# Altium PCB FULL_2_PCB.PcbDoc
Units mm, origin at the board's own origin, x right, y up, seen from the top; angles counter-clockwise.
Board outline 92.2 x 63.3 mm, 3 copper layers (Top Layer, Internal Plane 13, Bottom Layer); 44 components, 9 nets, 244 pads, 16 vias.
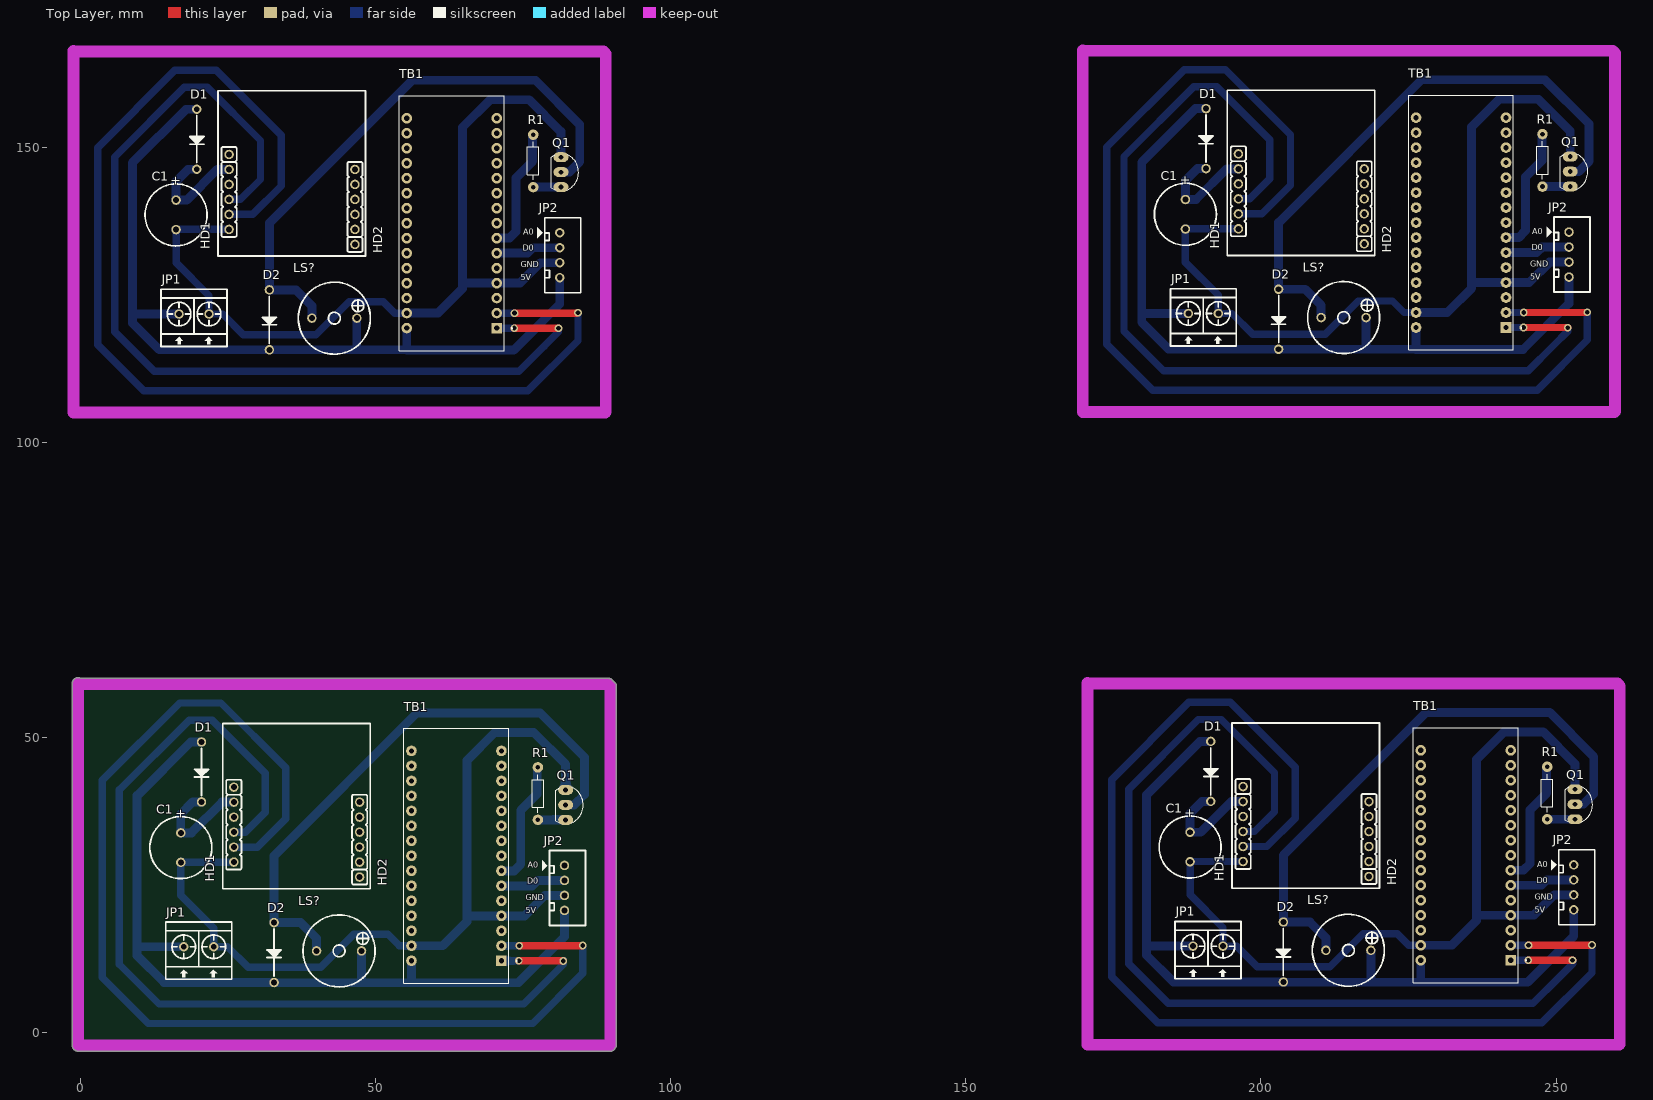
[diagram p0: Top Layer view]
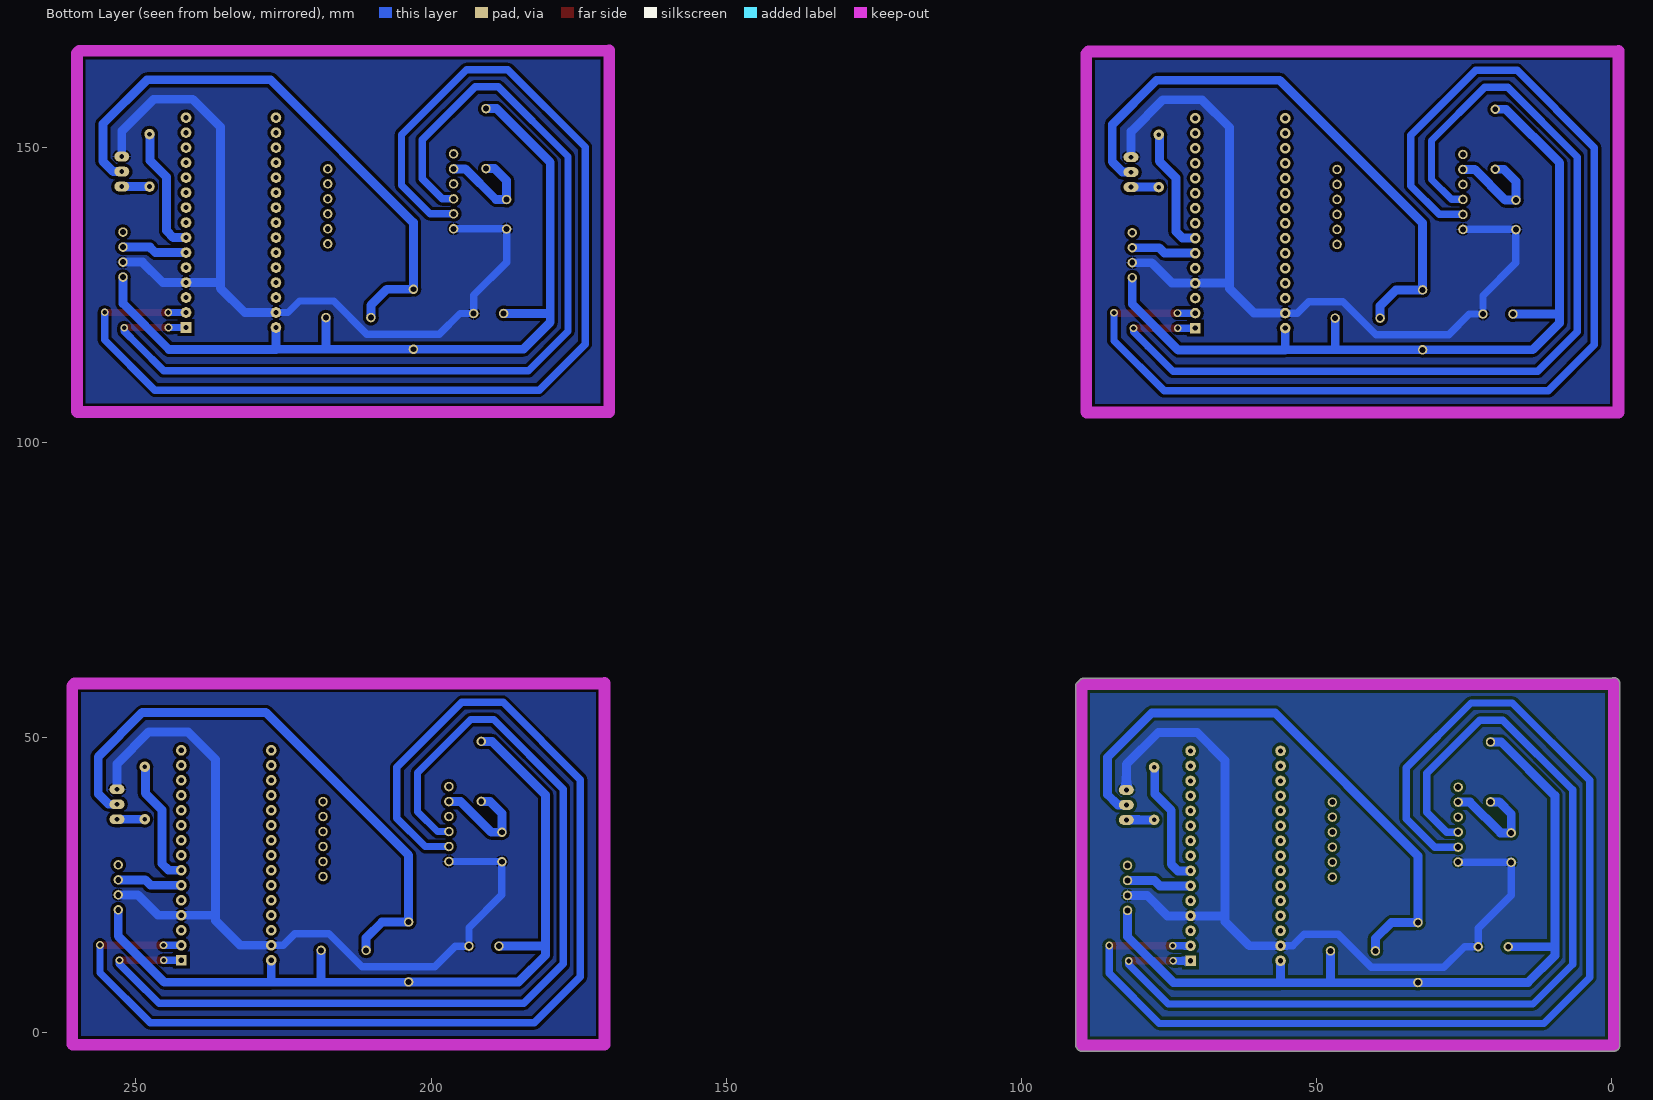
[diagram p1: Bottom Layer view, seen from below]
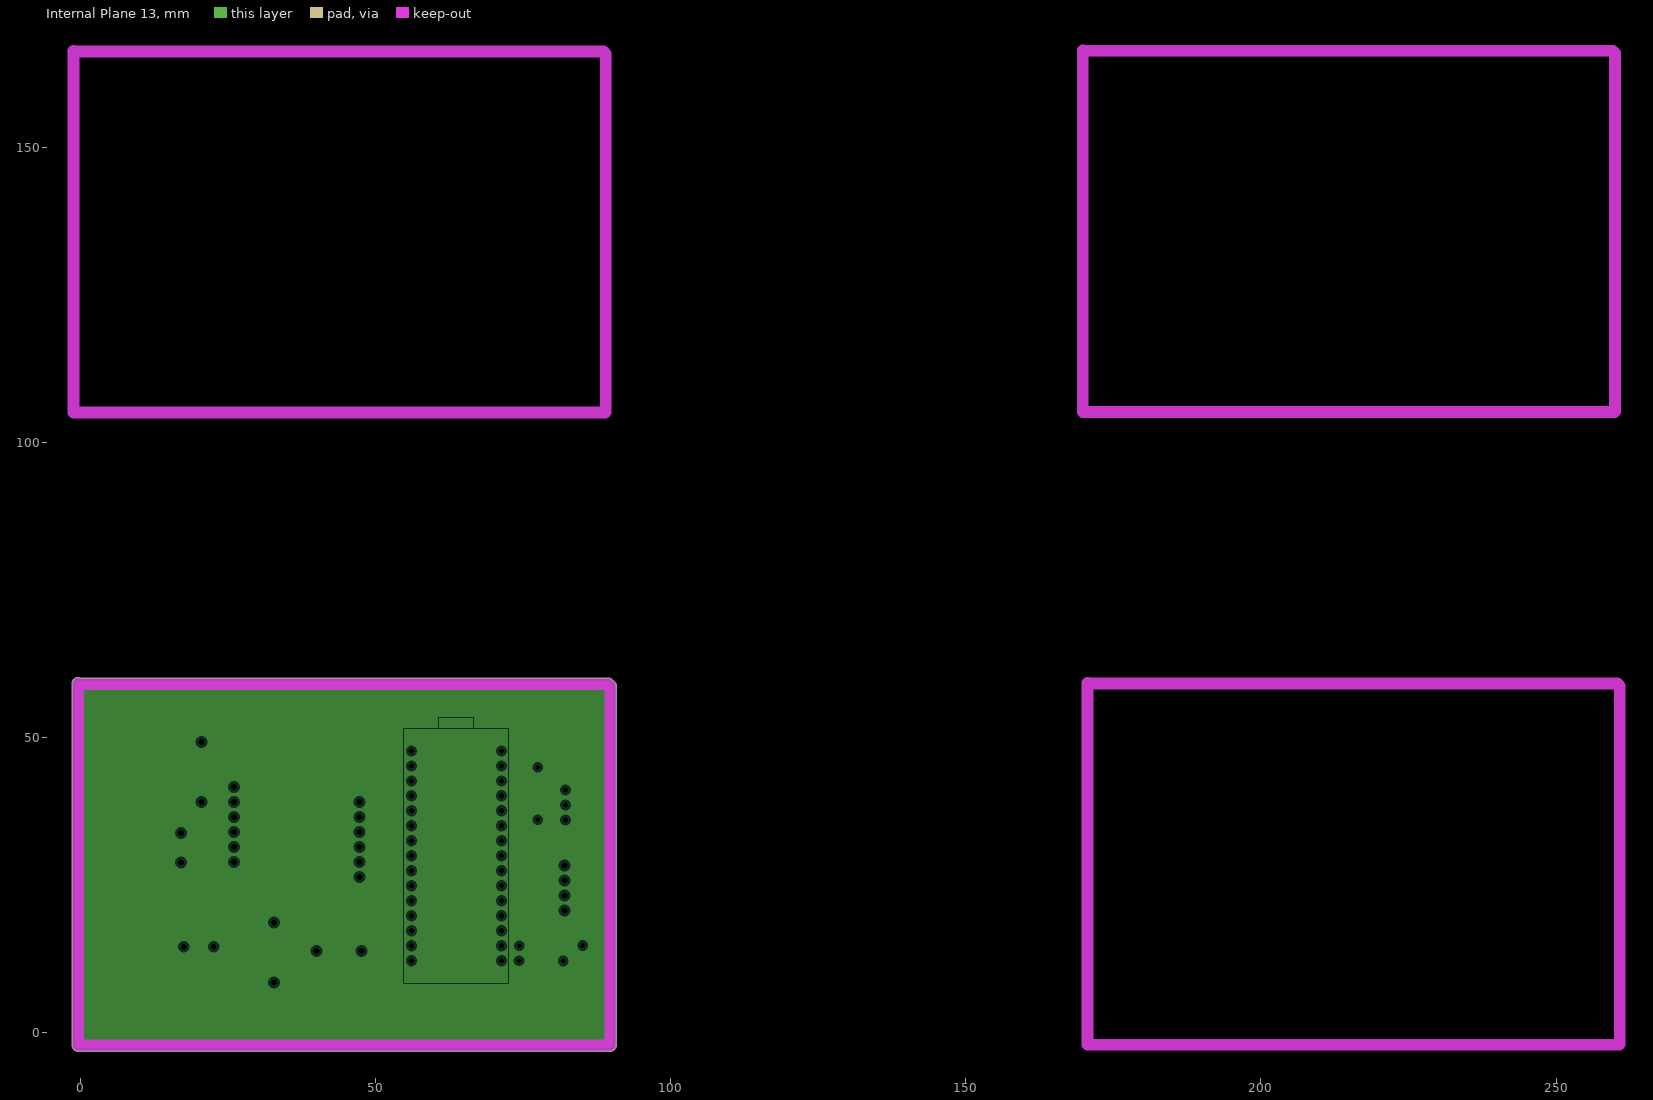
[diagram p2: Internal Plane 13, clearances drawn from the general rule]

## Layer stack, top to bottom
Top Solder: solder mask 0.0102, Solder Resist, Dk 3.5
Top Layer: signal copper 0.0356
Dielectric 1: dielectric 0.32, FR-4, Dk 4.8
Internal Plane 13: plane copper 0.0356
Dielectric2: dielectric 0.32, FR-4, Dk 4.8
Bottom Layer: signal copper 0.0356
Bottom Solder: solder mask 0.0102, Solder Resist, Dk 3.5

## Board outline
-1.4,-2.1 ccw(c-0.4,-2.1) -0.2,-3.08 ccw(c0,-2.1) 0,-3.1 89.7,-3.1 ccw(c89.7,-2.1) 90.456,-2.756 ccw(c89.8,-2) 90.8,-2 90.8,58.7 ccw(c89.8,58.7) 90.279,59.579 ccw(c89.4,59.1) 89.4,60.1 0.036,60.1 ccw(c-0.4,59.2) -1.4,59.2

## Design rules (kind name [scope] priority, off if disabled: settings)
Clearance [All] p1: gap=0.5 ignorepadtopadclearanceinfootprint=FALSE
PlaneClearance [All] p1: clearance=0.508
PlaneConnect [All] p1: planeconnectstyle=Relief reliefexpansion=0.508 reliefentries=4 reliefconductorwidth=0.254 reliefairgap=0.254
PolygonConnect [All] p1: connectstyle=Relief reliefconductorwidth=0.254 reliefentries=4 polygonreliefangle="90 Angle" airgapwidth=0.254
RoomDefinition FULL_2_SCH [InComponentClass('FULL_2_SCH')] p1: confinementstyle=ConfineIn formatcopy=TRUE lockcomponents=FALSE outline -55.5,-57.6 -4.7,-57.6 -4.7,-32.2 -55.5,-32.2
RoutingVias [All] p1: holewidth=0.711 width=1.27 viastyle="Through Hole" minholewidth=0.711 minwidth=1.27 maxholewidth=0.711 maxwidth=1.27
SolderMaskExpansion [All] p1: expansion=0.102
Width [All] p1: maxlimit=2 minlimit=1 preferedwidth=1.25
28 further rules are at their usual default settings.

## Classes and differential pairs
component class FULL_2_SCH: C1 D1 D2 HD1 HD2 JP2 LS? Q1 R1 TB1

## Components (designator, comment, footprint, x,y, rotation, side; value= is the part's Value field where it differs from the comment)
C1 "1000uF" CAP_1000UF_16V 188,34 r270 top value=1000uF/16V
C1 "1000uF" CAP_1000UF_16V 187.2,141.2 r270 top value=1000uF/16V
C1 "1000uF" CAP_1000UF_16V 16.2,141.1 r270 top value=1000uF/16V
C1 "1000uF" CAP_1000UF_16V 17,33.9 r270 top value=1000uF/16V
D1 "1N4007" 1N4007 191.5,49.4 r270 top
D1 "1N4007" 1N4007 190.7,156.6 r270 top
D1 "1N4007" 1N4007 19.7,156.5 r270 top
D1 "1N4007" 1N4007 20.5,49.3 r270 top
D2 "1N4007" 1N4007 203.8,18.8 r270 top
D2 "1N4007" 1N4007 203,126 r270 top
D2 "1N4007" 1N4007 32,125.9 r270 top
D2 "1N4007" 1N4007 32.8,18.7 r270 top
HD1 "HD6" Header_6 196.98,35.39 r270 top
HD1 "HD6" Header_6 196.18,142.59 r270 top
HD1 "HD6" Header_6 25.18,142.49 r270 top
HD1 "HD6" Header_6 25.98,35.29 r270 top
HD2 "HD6" Header_6 218.3,32.85 r90 top
HD2 "HD6" Header_6 217.5,140.05 r90 top
HD2 "HD6" Header_6 46.5,139.95 r90 top
HD2 "HD6" Header_6 47.3,32.75 r90 top
JP1 "ED2609-ND" DOMINO_OSTTC_2P 191.04,14.7 r180 top value="Connector 2"
JP1 "ED2609-ND" DOMINO_OSTTC_2P 190.24,121.9 r180 top value="Connector 2"
JP1 "ED2609-ND" DOMINO_OSTTC_2P 19.24,121.8 r180 top value="Connector 2"
JP1 "ED2609-ND" DOMINO_OSTTC_2P 20.04,14.6 r180 top value="Connector 2"
JP2 "JP4" CON4 253,24.67 r270 top value="Connector 4"
JP2 "JP4" CON4 252.2,131.87 r270 top value="Connector 4"
JP2 "JP4" CON4 81.2,131.77 r270 top value="Connector 4"
JP2 "JP4" CON4 82,24.57 r270 top value="Connector 4"
LS? "TMB12A05" SPEAKER 218.62,14 r180 top
LS? "TMB12A05" SPEAKER 217.82,121.2 r180 top
LS? "TMB12A05" SPEAKER 46.82,121.1 r180 top
LS? "TMB12A05" SPEAKER 47.62,13.9 r180 top
Q1 "C1815" QTO-92 253.2,38.74 r270 top
Q1 "C1815" QTO-92 252.4,145.94 r270 top
Q1 "C1815" QTO-92 81.4,145.84 r270 top
Q1 "C1815" QTO-92 82.2,38.64 r270 top
R1 "2k2" R1/4W 248.5,36.2 r90 top value="R1/4W - 1K"
R1 "2k2" R1/4W 247.7,143.4 r90 top value="R1/4W - 1K"
R1 "2k2" R1/4W 76.7,143.3 r90 top value="R1/4W - 1K"
R1 "2k2" R1/4W 77.5,36.1 r90 top value="R1/4W - 1K"
TB1 "ARDUINO_NANO" *SHIELD_ARDUINO_NANO 234.7,30.1 r180 top
TB1 "ARDUINO_NANO" *SHIELD_ARDUINO_NANO 233.9,137.3 r180 top
TB1 "ARDUINO_NANO" *SHIELD_ARDUINO_NANO 62.9,137.2 r180 top
TB1 "ARDUINO_NANO" *SHIELD_ARDUINO_NANO 63.7,30 r180 top

## Footprints (in the part's own frame and the unit in brackets; to place one, negate y for a bottom-side part, rotate by r counter-clockwise, add the part's x,y. Pads: shape width x height; smd on the part's side, far side on the other; paste and mask are expansions set on the pad)
1N4007 [mm] "DIODE_DIP"
  round 1.6 hole 1 mask+0.1: 1(0,0) 2(10.16,0)
  silkscreen extent 1.08,-1.2 9.08,1.21, body extent -0.72,-1.25 10.88,1.25, height 2.75
*SHIELD_ARDUINO_NANO [mm]
  rect 1.8x1.8 hole 0.9: 1(-7.62,17.78)
  round 1.8 hole 0.9: 2(-7.62,15.24) 3(-7.62,12.7) 4(-7.62,10.16) 5(-7.62,7.62) 6(-7.62,5.08) 7(-7.62,2.54) 8(-7.62,0) 9(-7.62,-2.54) 10(-7.62,-5.08) 11(-7.62,-7.62) 12(-7.62,-10.16) 13(-7.62,-12.7) 14(-7.62,-15.24) 15(-7.62,-17.78) 16(7.62,-17.78) 17(7.62,-15.24) 18(7.62,-12.7) 19(7.62,-10.16) 20(7.62,-7.62) 21(7.62,-5.08) 22(7.62,-2.54) 23(7.62,0) 24(7.62,2.54) 25(7.62,5.08) 26(7.62,7.62) 27(7.62,10.16) 28(7.62,12.7) 29(7.62,15.24) 30(7.62,17.78)
  Internal Plane 13 circle w0.2: c-10.2,17.8 r0.1
  Internal Plane 13 circle w0.2: c-10.2,17.8 r0.1
  Internal Plane 13 lines w0.127: 8.89,21.59 8.89,-21.59 ; 8.89,21.59 -8.89,21.59 ; 8.89,21.59 8.89,-21.59 ; 8.89,21.59 -8.89,21.59 ; 8.89,-21.59 3,-21.59 ; 8.89,-21.59 3,-21.59 ; 3,-21.59 3,-23.495 ; 3,-21.59 -2.97,-21.59 ; 3,-21.59 3,-23.495 ; 3,-21.59 -2.97,-21.59 ; 3,-23.495 -2.97,-23.495 ; 3,-23.495 -2.97,-23.495 ; -2.97,-21.59 -2.97,-23.495 ; -2.97,-21.59 -8.89,-21.59 ; -2.97,-21.59 -2.97,-23.495 ; -2.97,-21.59 -8.89,-21.59 ; -8.89,21.59 -8.89,-21.59 ; -8.89,21.59 -8.89,-21.59
  silkscreen extent -10.3,-21.59 8.89,21.59
CAP_1000UF_16V [mm] "Capacitor, Electrolytic, Radial; Body 10 x 16 mm (Dia.xH typ); Pin Spacing 5 mm (typ)"
  round 1.6 hole 1: 1(0,0) 2(5,0)
  silkscreen extent -2.75,-5.25 7.75,5.25, body extent -2.53,-5.03 7.53,5.03, height 16.53
CON4 [mm] "CON4"
  round 1.6 hole 1 mask+0.1: 1(-3.81,0) 2(-1.27,0) 3(1.27,0) 4(3.81,0)
  silkscreen extent -6.35,-3.8 6.35,3.56, body extent -6.25,-2.29 6.25,3.41, height 7
DOMINO_OSTTC_2P [mm] "15A PIN TO PIN 5.08MM ED2609-ND"
  round 1.6 hole 1 mask+0.1: 1(-2.54,0) 2(2.54,0)
  silkscreen extent -5.58,-4.2 5.58,5.5, body extent -5.42,-3.75 5.34,5.25, height 12.5
Header_6 [mm] "Connector DIP Male, 6Pin_2.54mm"
  round 1.6 hole 1 mask+0.1: 1(-6.35,0) 2(-3.81,0) 3(-1.27,0) 4(1.27,0) 5(3.81,0) 6(6.35,0)
  silkscreen extent -7.62,-1.28 7.62,1.28, body extent -7.62,-1.27 7.62,1.27, height 10.1
QTO-92 [mil] "TO-92"
  oval 66x100 hole 32: 1(-100,0) 2(0,0) 3(100,0)
  silkscreen extent -117,-65 120,118, body extent -109,-66 109,95, height 245
R1/4W [mil] "R 1/4W, 2 Pin, 350mil"
  round 70 hole 31: 1(0,0) 2(350,0)
  silkscreen extent 48,-38 302,38, body extent -40,-47 386,47, height 111
SPEAKER [mm] "TMB12A05"
  round 1.6 hole 1 mask+0.1: 1(0,0) 2(7.62,0)
  silkscreen extent -2.29,-6.1 9.91,6.1, body extent -3,-7 11,7, height 7.35

## Part data
C1 C1 C1 C1: library part CP4, "Cap 1000uF/16V - 220uF/50V", Description 1="2200uF-3300uF/6,3V - 1000uF-2200uF/10V", Description 2="1000uF/16V - 470uF => 1000uF/25V - 100uF/100V", Description 3=330uF>470uF/35V_220uF>470uF/50V_10uF>22uF/250V, Description 4="220uF => 330uF/63V - 10uF =>33uF/160 - 200V", Description 5="4,7uF>10uF/250V_3,3uF>10uF/400V - 2,2uF>4,7uF/450V"
D1 D1 D1 D1 D2 D2 D2 D2: "Diode LS 1A 1000V DO-41", ComponentLink1Description=Datasheet, ComponentLink1URL="D:\Dropbox\Datasheets\Diodes and Rectifiers\Diodes\1N400X.pdf", Unit Price=0.0072
HD1 HD1 HD1 HD1 HD2 HD2 HD2 HD2: library part Header6, "Header 6", Creat by=VanDungEvn@Gmail.com
JP1 JP1 JP1 JP1: library part Con2_1, "Connector 2"
JP2 JP2 JP2 JP2: library part Con4, "Connector 4"
LS? LS? LS? LS?: library part Buzz, "Buzzer >= 80dB, 5V"
Q1 Q1 Q1 Q1: "NPN 600mW, ECB", =C2383
R1 R1 R1 R1: library part R1/4W, "Resistor 1/4W"
TB1 TB1 TB1 TB1: "ATmega4809 Arduino Nano Every with Headers AVR® AVR MCU 8-Bit Embedded Evaluation Board", Package=None, Availability=Unavailable, MF=Arduino, MP="ARDUINO NANO", Price=None, SnapEDA_Link=https://www.snapeda.com/parts/ARDUINO%20NANO/Arduino/view-part/1128261/?ref=snap

## Via types
v1: diameter 1.3, hole 0.8, Top Layer to Bottom Layer, 16 vias

## Nets (pads, with @x,y where several pads share a name; then routed paths per layer and width w, separated by ;. In a path a pad name is that pad's centre, name@x,y a point inside that pad or via, vN(x,y) a via of type N, cw(c..) or ccw(c..) an arc to the next point about the centre after c; other vN are vias at no path point)
5V: D1.1@20.5,49.3 D2.2@32.8,8.54 JP1.2@17.5,14.6 JP2.4@82,20.76 LS?.1@47.62,13.9 TB1.30@56.08,12.22 | length 140.1
  Bottom Layer w1.5: JP1.2@17.5,14.6 9.7,14.6 9.6,14.5 ; D1.1@20.5,49.3 18.7,49.3 9.6,40.2 9.6,14.5 ; 47.62,9.22 LS?.1@47.62,13.9 ; TB1.30@56.08,12.22 56.08,8.5 ; JP2.4@82,20.76 82,16.3 74.2,8.5 56.08,8.5 ; 9.6,14.5 9.6,13.1 14.16,8.54 32.8,8.54 56.08,8.5
D0: JP2.2@82,25.84 TB1.6@71.32,24.92 | length 11.1
  Bottom Layer w1.5: TB1.6@71.32,24.92 76.52,24.92 77.44,25.84 JP2.2@82,25.84
GND: C1.2@17,28.9 HD1.6@25.98,28.94 JP1.1@22.58,14.6 JP2.3@82,23.3 Q1.1@82.2,41.18 TB1.4@71.32,19.84 TB1.29@56.08,14.76 | length 145.3
  Bottom Layer w1.25: C1.2@17,28.9 17,23.3 22.58,17.72 22.58,14.6 24.9,14.6 28.4,11.1 40.7,11.1 46.3,16.7 52.1,16.7 54.04,14.76 TB1.29@56.08,14.76 ; C1.2@17.04,28.94 HD1.6@25.98,28.94
  Bottom Layer w1.5: C1.2@17,28.9 C1.2@17.04,28.94 ; TB1.29@56.08,14.76 61.36,14.76 65.5,18.9 65.5,19.9 ; JP2.3@82,23.3 78.7,23.3 75.24,19.84 71.32,19.84 65.56,19.84 65.5,19.9 ; Q1.1@82.2,41.18 82.2,45.5 76.8,50.9 70.2,50.9 65.5,46.2 65.5,19.9
NetC1_1: C1.1@17,33.9 D1.2@20.5,39.14 HD1.2@25.98,39.1 | length 18.7
  Bottom Layer w1.5: D1.2@20.5,39.14 19.04,39.14 17,37.1 17,33.9 18.8,33.9 24,39.1 HD1.2@25.98,39.1
NetD2_1: D2.1@32.8,18.7 LS?.2@40,13.9 Q1.2@82.2,38.64 | length 97.7
  Bottom Layer w1.5: LS?.2@40,13.9 40,16 37.3,18.7 32.8,18.7 32.8,30 57,54.2 77.9,54.2 85.4,46.7 85.4,40.4 83.64,38.64 Q1.2@82.2,38.64
NetQ1_3: Q1.3@82.2,36.1 R1.1@77.5,36.1 | length 4.7
  Bottom Layer w1.5: R1.1@77.5,36.1 Q1.3@82.2,36.1
NetR1_2: R1.2@77.5,44.99 TB1.7@71.32,27.46 | length 21.3
  Bottom Layer w1.5: TB1.7@71.32,27.46 73.46,27.46 74.6,28.6 74.6,37.7 77.4,40.5 77.4,44.89 R1.2@77.5,44.99
RXD: HD1.5@25.98,31.48 TB1.2@71.32,14.76 | length 200.4
  Top Layer w1.25: v1(74.34,14.76) v1@84.96,14.76
  Bottom Layer w1.25: HD1.5@25.98,31.48 29.98,31.48 34.8,36.3 34.8,44.9 23.8,55.9 16.8,55.9 3.7,42.8 3.7,9.4 11.5,1.6 76.6,1.6 85.1,10.1 v1(85.1,14.8) ; TB1.2@71.32,14.76 v1(74.34,14.76)
TXD: HD1.4@25.98,34.02 TB1.1@71.32,12.22 | length 168.1
  Top Layer w1.25: v1(74.28,12.22) 81.78,12.22 v1(81.8,12.2)
  Bottom Layer w1.25: HD1.4@25.98,34.02 27.92,34.02 31.3,37.4 31.3,44 22.3,53 18.4,53 6.6,41.2 6.6,11.6 13.3,4.9 75.1,4.9 79.375,9.175 81.8,11.6 v1(81.8,12.2) ; TB1.1@71.32,12.22 v1(74.28,12.22)
pads on no net: C1.1@16.2,141.1 C1.1@187.2,141.2 C1.1@188,34 C1.2@16.2,136.1 C1.2@187.2,136.2 C1.2@188,29 D1.1@19.7,156.5 D1.1@190.7,156.6 D1.1@191.5,49.4 D1.2@19.7,146.34 D1.2@190.7,146.44 D1.2@191.5,39.24 D2.1@32,125.9 D2.1@203,126 D2.1@203.8,18.8 D2.2@32,115.74 D2.2@203,115.84 D2.2@203.8,8.64 HD1.1 HD1.2@25.18,146.3 HD1.2@196.18,146.4 HD1.2@196.98,39.2 HD1.3 HD1.4@25.18,141.22 HD1.4@196.18,141.32 HD1.4@196.98,34.12 HD1.5@25.18,138.68 HD1.5@196.18,138.78 HD1.5@196.98,31.58 HD1.6@25.18,136.14 HD1.6@196.18,136.24 HD1.6@196.98,29.04 HD2.1 HD2.2 HD2.3 HD2.4 HD2.5 HD2.6 JP1.1@21.78,121.8 JP1.1@192.78,121.9 JP1.1@193.58,14.7 JP1.2@16.7,121.8 JP1.2@187.7,121.9 JP1.2@188.5,14.7 JP2.1 JP2.2@81.2,133.04 JP2.2@252.2,133.14 JP2.2@253,25.94 JP2.3@81.2,130.5 JP2.3@252.2,130.6 JP2.3@253,23.4 JP2.4@81.2,127.96 JP2.4@252.2,128.06 JP2.4@253,20.86 LS?.1@46.82,121.1 LS?.1@217.82,121.2 LS?.1@218.62,14 LS?.2@39.2,121.1 LS?.2@210.2,121.2 LS?.2@211,14 Q1.1@81.4,148.38 Q1.1@252.4,148.48 Q1.1@253.2,41.28 Q1.2@81.4,145.84 Q1.2@252.4,145.94 Q1.2@253.2,38.74 Q1.3@81.4,143.3 Q1.3@252.4,143.4 Q1.3@253.2,36.2 R1.1@76.7,143.3 R1.1@247.7,143.4 R1.1@248.5,36.2 R1.2@76.7,152.19 R1.2@247.7,152.29 R1.2@248.5,45.09 TB1.1@70.52,119.42 TB1.1@241.52,119.52 TB1.1@242.32,12.32 TB1.2@70.52,121.96 TB1.2@241.52,122.06 TB1.2@242.32,14.86 TB1.3 TB1.4@70.52,127.04 TB1.4@241.52,127.14 TB1.4@242.32,19.94 TB1.5 TB1.6@70.52,132.12 TB1.6@241.52,132.22 TB1.6@242.32,25.02 TB1.7@70.52,134.66 TB1.7@241.52,134.76 TB1.7@242.32,27.56 TB1.8 TB1.9 TB1.10 TB1.11 TB1.12 TB1.13 TB1.14 TB1.15 TB1.16 TB1.17 TB1.18 TB1.19 TB1.20 TB1.21 TB1.22 TB1.23 TB1.24 TB1.25 TB1.26 TB1.27 TB1.28 TB1.29@55.28,121.96 TB1.29@226.28,122.06 TB1.29@227.08,14.86 TB1.30@55.28,119.42 TB1.30@226.28,119.52 TB1.30@227.08,12.32
copper on no net: | length 2421.9
  Top Layer w1.25: v1(73.48,119.42) 80.98,119.42 v1(81,119.4) ; v1(73.54,121.96) v1@84.16,121.96 ; v1(244.48,119.52) 251.98,119.52 v1(252,119.5) ; v1(244.54,122.06) v1@255.16,122.06 ; v1(245.28,12.32) 252.78,12.32 v1(252.8,12.3) ; v1(245.34,14.86) v1@255.96,14.86
  Bottom Layer w1.25: 16.2,136.1 16.2,130.5 21.78,124.92 21.78,121.8 24.1,121.8 27.6,118.3 39.9,118.3 45.5,123.9 51.3,123.9 53.24,121.96 55.28,121.96 ; 16.24,136.14 25.18,136.14 ; 25.18,138.68 29.18,138.68 34,143.5 34,152.1 23,163.1 16,163.1 2.9,150 2.9,116.6 10.7,108.8 75.8,108.8 84.3,117.3 v1(84.3,122) ; 25.18,141.22 27.12,141.22 30.5,144.6 30.5,151.2 21.5,160.2 17.6,160.2 5.8,148.4 5.8,118.8 12.5,112.1 74.3,112.1 78.575,116.375 81,118.8 v1(81,119.4) ; 70.52,119.42 v1(73.48,119.42) ; 70.52,121.96 v1(73.54,121.96) ; 187.2,136.2 187.2,130.6 192.78,125.02 192.78,121.9 195.1,121.9 198.6,118.4 210.9,118.4 216.5,124 222.3,124 224.24,122.06 226.28,122.06 ; 187.24,136.24 196.18,136.24 ; 188,29 188,23.4 193.58,17.82 193.58,14.7 195.9,14.7 199.4,11.2 211.7,11.2 217.3,16.8 223.1,16.8 225.04,14.86 227.08,14.86 ; 188.04,29.04 196.98,29.04 ; 196.18,138.78 200.18,138.78 205,143.6 205,152.2 194,163.2 187,163.2 173.9,150.1 173.9,116.7 181.7,108.9 246.8,108.9 255.3,117.4 v1(255.3,122.1) ; 196.18,141.32 198.12,141.32 201.5,144.7 201.5,151.3 192.5,160.3 188.6,160.3 176.8,148.5 176.8,118.9 183.5,112.2 245.3,112.2 249.575,116.475 252,118.9 v1(252,119.5) ; 196.98,31.58 200.98,31.58 205.8,36.4 205.8,45 194.8,56 187.8,56 174.7,42.9 174.7,9.5 182.5,1.7 247.6,1.7 256.1,10.2 v1(256.1,14.9) ; 196.98,34.12 198.92,34.12 202.3,37.5 202.3,44.1 193.3,53.1 189.4,53.1 177.6,41.3 177.6,11.7 184.3,5 246.1,5 250.375,9.275 252.8,11.7 v1(252.8,12.3) ; 241.52,119.52 v1(244.48,119.52) ; 241.52,122.06 v1(244.54,122.06) ; 242.32,12.32 v1(245.28,12.32) ; 242.32,14.86 v1(245.34,14.86)
  Bottom Layer w1.5: 16.2,136.1 16.24,136.14 ; 16.7,121.8 8.9,121.8 8.8,121.7 ; 19.7,146.34 18.24,146.34 16.2,144.3 16.2,141.1 18,141.1 23.2,146.3 25.18,146.3 ; 19.7,156.5 17.9,156.5 8.8,147.4 8.8,121.7 ; 39.2,121.1 39.2,123.2 36.5,125.9 32,125.9 32,137.2 56.2,161.4 77.1,161.4 84.6,153.9 84.6,147.6 82.84,145.84 81.4,145.84 ; 46.82,116.42 46.82,121.1 ; 55.28,119.42 55.28,115.7 ; 55.28,121.96 60.56,121.96 64.7,126.1 64.7,127.1 ; 70.52,132.12 75.72,132.12 76.64,133.04 81.2,133.04 ; 70.52,134.66 72.66,134.66 73.8,135.8 73.8,144.9 76.6,147.7 76.6,152.09 76.7,152.19 ; 76.7,143.3 81.4,143.3 ; 81.2,127.96 81.2,123.5 73.4,115.7 55.28,115.7 ; 81.2,130.5 77.9,130.5 74.44,127.04 70.52,127.04 64.76,127.04 64.7,127.1 ; 81.4,148.38 81.4,152.7 76,158.1 69.4,158.1 64.7,153.4 64.7,127.1 ; 187.2,136.2 187.24,136.24 ; 187.7,121.9 179.9,121.9 179.8,121.8 ; 188,29 188.04,29.04 ; 188.5,14.7 180.7,14.7 180.6,14.6 ; 190.7,146.44 189.24,146.44 187.2,144.4 187.2,141.2 189,141.2 194.2,146.4 196.18,146.4 ; 190.7,156.6 188.9,156.6 179.8,147.5 179.8,121.8 ; 191.5,39.24 190.04,39.24 188,37.2 188,34 189.8,34 195,39.2 196.98,39.2 ; 191.5,49.4 189.7,49.4 180.6,40.3 180.6,14.6 ; 210.2,121.2 210.2,123.3 207.5,126 203,126 203,137.3 227.2,161.5 248.1,161.5 255.6,154 255.6,147.7 253.84,145.94 252.4,145.94 ; 211,14 211,16.1 208.3,18.8 203.8,18.8 203.8,30.1 228,54.3 248.9,54.3 256.4,46.8 256.4,40.5 254.64,38.74 253.2,38.74 ; 217.82,116.52 217.82,121.2 ; 218.62,9.32 218.62,14 ; 226.28,119.52 226.28,115.8 ; 226.28,122.06 231.56,122.06 235.7,126.2 235.7,127.2 ; 227.08,12.32 227.08,8.6 ; 227.08,14.86 232.36,14.86 236.5,19 236.5,20 ; 241.52,132.22 246.72,132.22 247.64,133.14 252.2,133.14 ; 241.52,134.76 243.66,134.76 244.8,135.9 244.8,145 247.6,147.8 247.6,152.19 247.7,152.29 ; 242.32,25.02 247.52,25.02 248.44,25.94 253,25.94 ; 242.32,27.56 244.46,27.56 245.6,28.7 245.6,37.8 248.4,40.6 248.4,44.99 248.5,45.09 ; 247.7,143.4 252.4,143.4 ; 248.5,36.2 253.2,36.2 ; 252.2,128.06 252.2,123.6 244.4,115.8 226.28,115.8 ; 252.2,130.6 248.9,130.6 245.44,127.14 241.52,127.14 235.76,127.14 235.7,127.2 ; 252.4,148.48 252.4,152.8 247,158.2 240.4,158.2 235.7,153.5 235.7,127.2 ; 253,20.86 253,16.4 245.2,8.6 227.08,8.6 ; 253,23.4 249.7,23.4 246.24,19.94 242.32,19.94 236.56,19.94 236.5,20 ; 253.2,41.28 253.2,45.6 247.8,51 241.2,51 236.5,46.3 236.5,20 ; 8.8,121.7 8.8,120.3 13.36,115.74 32,115.74 55.28,115.7 ; 179.8,121.8 179.8,120.4 184.36,115.84 203,115.84 226.28,115.8 ; 180.6,14.6 180.6,13.2 185.16,8.64 203.8,8.64 227.08,8.6

## Polygon pours and split planes (outlines as drawn)
no net on Bottom Layer (solid, remove dead copper, pour order 30): 171,58.9 171.2,58.7 260.2,58.7 260.2,-1.5 260.1,-1.6 260,-1.5 170.6,-1.5 170.6,58.6 170.3,58.9
no net on Bottom Layer (solid, remove dead copper, pour order 28): 170.2,166.1 170.4,165.9 259.4,165.9 259.4,105.7 259.3,105.6 259.2,105.7 169.8,105.7 169.8,165.8 169.5,166.1
no net on Bottom Layer (solid, remove dead copper, pour order 26): -0.8,166 -0.6,165.8 88.4,165.8 88.4,105.6 88.3,105.5 88.2,105.6 -1.2,105.6 -1.2,165.7 -1.5,166
GND on Bottom Layer (solid, remove dead copper, pour order 24): 0,58.8 0.2,58.6 89.2,58.6 89.2,-1.6 89.1,-1.7 89,-1.6 -0.4,-1.6 -0.4,58.5 -0.7,58.8
no net on Internal Plane 13 (split plane): 66.605,51.655 60.765,51.655 60.765,53.43 66.605,53.43
no net on Internal Plane 13 (split plane): 72.525,8.475 54.875,8.475 54.875,51.525 72.525,51.525
no net on Internal Plane 13 (split plane): -0.304,59.683 -0.212,59.655 -0.186,59.641 -0.186,59.643 -0.159,59.629 -0.064,59.6 0.036,59.59 89.4,59.59 89.412,59.591 89.496,59.583 89.588,59.555 89.673,59.509 89.748,59.448 89.809,59.373 89.83,59.334 89.832,59.336 89.854,59.295 89.918,59.218 89.995,59.154 90.036,59.132 90.034,59.13 90.073,59.109 90.148,59.048 90.209,58.973 90.255,58.888 90.283,58.796 90.291,58.712 90.29,58.7 90.29,-2 90.291,-2.012 90.283,-2.096 90.255,-2.188 90.209,-2.273 90.148,-2.348 90.121,-2.37 90.123,-2.372 90.095,-2.395 90.072,-2.423 90.07,-2.421 90.048,-2.448 89.973,-2.509 89.888,-2.555 89.796,-2.583 89.712,-2.591 89.7,-2.59 0,-2.59 -0.012,-2.591 -0.087,-2.584 -0.098,-2.58 -0.1,-2.58 -0.2,-2.57 -0.3,-2.58 -0.302,-2.58 -0.313,-2.584 -0.4,-2.592 -0.496,-2.583 -0.588,-2.555 -0.673,-2.509 -0.748,-2.448 -0.809,-2.373 -0.855,-2.288 -0.883,-2.196 -0.891,-2.112 -0.89,-2.1 -0.89,59.2 -0.891,59.212 -0.883,59.296 -0.855,59.388 -0.809,59.473 -0.748,59.548 -0.673,59.609 -0.588,59.655 -0.496,59.683 -0.4,59.692

## Keep-outs
Keep-Out Layer:
  lines w2: -1.2,105.1 -1.2,166.4 ; -1.1,166.3 88.6,166.3 89,165.9 89,105.2 88.9,105.1 -0.8,105.1 -0.9,105.2 ; -0.4,-2.1 -0.4,59.2 ; -0.3,59.1 89.4,59.1 89.8,58.7 89.8,-2 89.7,-2.1 0,-2.1 -0.1,-2 ; 169.8,105.2 169.8,166.5 ; 169.9,166.4 259.6,166.4 260,166 260,105.3 259.9,105.2 170.2,105.2 170.1,105.3 ; 170.6,-2 170.6,59.3 ; 170.7,59.2 260.4,59.2 260.8,58.8 260.8,-1.9 260.7,-2 171,-2 170.9,-1.9

## Silkscreen, mask and mechanical layers (free items; w line width, h text height)
Top Overlay:
  lines w0.3: 23.3,131.62 23.3,159.62 48.3,159.62 48.3,131.62 23.3,131.62 ; 24.1,24.42 49.1,24.42 49.1,52.42 24.1,52.42 24.1,24.42 ; 194.3,131.72 219.3,131.72 219.3,159.72 194.3,159.72 194.3,131.72 ; 195.1,24.52 195.1,52.52 220.1,52.52 220.1,24.52 195.1,24.52
  text "A0" at 246,135.3 h1
  text "A0" at 75,135.2 h1
  text "D0" at 245.9,132.6 h1
  text "D0" at 74.9,132.5 h1
  text "GND" at 245.6,129.8 h1
  text "GND" at 74.6,129.7 h1
  text "5V" at 245.6,127.6 h1
  text "5V" at 74.6,127.5 h1
  text "A0" at 246.8,28.1 h1
  text "A0" at 75.8,28 h1
  text "D0" at 246.7,25.4 h1
  text "D0" at 75.7,25.3 h1
  text "GND" at 246.4,22.6 h1
  text "GND" at 75.4,22.5 h1
  text "5V" at 246.4,20.4 h1
  text "5V" at 75.4,20.3 h1

## Text inside footprints (layer, text, board x,y; h text height)
C1: Top Overlay "+" at 187.3,38.1 h1.5 r270; Mechanical 1 "+" at 187.3,36.2 h1.5 r270; Mechanical 1 "1" at 187.4,34.2 h1.2 r270; Mechanical 1 "2" at 187.4,29.3 h1.2 r270
C1: Top Overlay "+" at 186.5,145.3 h1.5 r270; Mechanical 1 "+" at 186.5,143.4 h1.5 r270; Mechanical 1 "1" at 186.6,141.4 h1.2 r270; Mechanical 1 "2" at 186.6,136.5 h1.2 r270
C1: Top Overlay "+" at 15.5,145.2 h1.5 r270; Mechanical 1 "+" at 15.5,143.3 h1.5 r270; Mechanical 1 "1" at 15.6,141.3 h1.2 r270; Mechanical 1 "2" at 15.6,136.4 h1.2 r270
C1: Top Overlay "+" at 16.3,38 h1.5 r270; Mechanical 1 "2" at 16.4,29.2 h1.2 r270; Mechanical 1 "1" at 16.4,34.1 h1.2 r270; Mechanical 1 "+" at 16.3,36.1 h1.5 r270
HD1: Mechanical 1 "HD?" at 197.03,35.34 h0.8 r270; Mechanical 1 "1" at 196.58,41.99 h1 r270; Mechanical 1 "6" at 196.58,29.29 h1 r270
HD1: Mechanical 1 "HD?" at 196.23,142.54 h0.8 r270; Mechanical 1 "1" at 195.78,149.19 h1 r270; Mechanical 1 "6" at 195.78,136.49 h1 r270
HD1: Mechanical 1 "HD?" at 25.23,142.44 h0.8 r270; Mechanical 1 "1" at 24.78,149.09 h1 r270; Mechanical 1 "6" at 24.78,136.39 h1 r270
HD1: Mechanical 1 "6" at 25.58,29.19 h1 r270; Mechanical 1 "1" at 25.58,41.89 h1 r270; Mechanical 1 "HD?" at 26.03,35.24 h0.8 r270
HD2: Mechanical 1 "HD?" at 218.25,32.9 h0.8 r90; Mechanical 1 "1" at 218.7,26.25 h1 r90; Mechanical 1 "6" at 218.7,38.95 h1 r90
HD2: Mechanical 1 "HD?" at 217.45,140.1 h0.8 r90; Mechanical 1 "1" at 217.9,133.45 h1 r90; Mechanical 1 "6" at 217.9,146.15 h1 r90
HD2: Mechanical 1 "HD?" at 46.45,140 h0.8 r90; Mechanical 1 "1" at 46.9,133.35 h1 r90; Mechanical 1 "6" at 46.9,146.05 h1 r90
HD2: Mechanical 1 "6" at 47.7,38.85 h1 r90; Mechanical 1 "1" at 47.7,26.15 h1 r90; Mechanical 1 "HD?" at 47.25,32.8 h0.8 r90
JP1: Mechanical 2 "2" at 188.9,15.3 h1.2 r180; Mechanical 2 "1" at 193.78,15.3 h1.2 r180
JP1: Mechanical 2 "2" at 188.1,122.5 h1.2 r180; Mechanical 2 "1" at 192.98,122.5 h1.2 r180
JP1: Mechanical 2 "2" at 17.1,122.4 h1.2 r180; Mechanical 2 "1" at 21.98,122.4 h1.2 r180
JP1: Mechanical 2 "1" at 22.78,15.2 h1.2 r180; Mechanical 2 "2" at 17.9,15.2 h1.2 r180
JP2: Mechanical 2 "4" at 252.5,21.27 h1 r270; Mechanical 2 "1" at 252.5,28.57 h1 r270
JP2: Mechanical 2 "4" at 251.7,128.47 h1 r270; Mechanical 2 "1" at 251.7,135.77 h1 r270
JP2: Mechanical 2 "4" at 80.7,128.37 h1 r270; Mechanical 2 "1" at 80.7,135.67 h1 r270
JP2: Mechanical 2 "1" at 81.5,28.47 h1 r270; Mechanical 2 "4" at 81.5,21.17 h1 r270
LS?: Mechanical 2 "2" at 211.3,14.6 h1.2 r180; Mechanical 2 "1" at 218.82,14.5 h1.2 r180
LS?: Mechanical 2 "2" at 210.5,121.8 h1.2 r180; Mechanical 2 "1" at 218.02,121.7 h1.2 r180
LS?: Mechanical 2 "2" at 39.5,121.7 h1.2 r180; Mechanical 2 "1" at 47.02,121.6 h1.2 r180
LS?: Mechanical 2 "1" at 47.82,14.4 h1.2 r180; Mechanical 2 "2" at 40.3,14.5 h1.2 r180